# Altium PCB Reader32chv2.PcbDoc
Units mm, origin at the board's own origin, x right, y up, seen from the top; angles counter-clockwise.
Board outline 30.43 x 36.22 mm, 4 copper layers (Top Layer, Signal Layer 1, Signal Layer 2, Bottom Layer), stack 0.778 mm thick; 35 components, 73 nets, 286 pads, 85 vias.
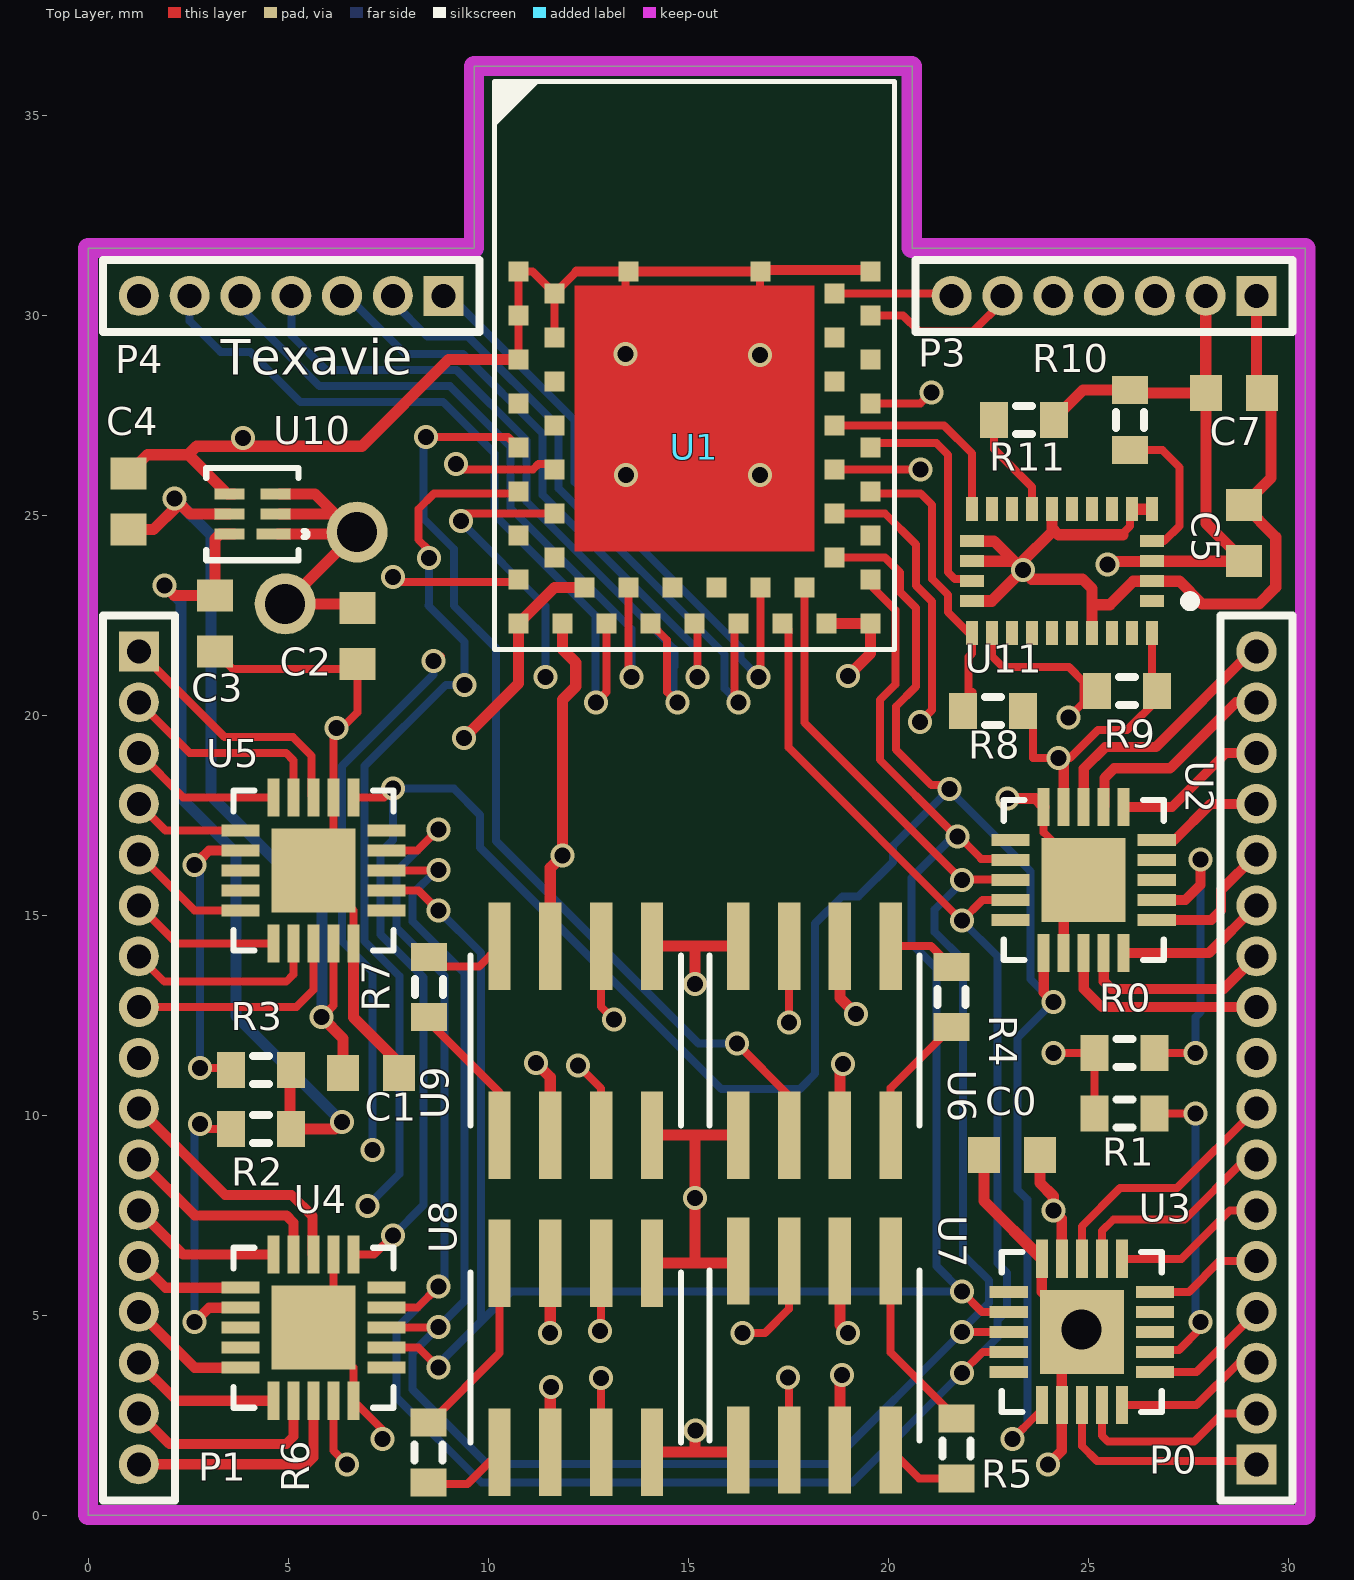
[diagram p0: Top Layer view]
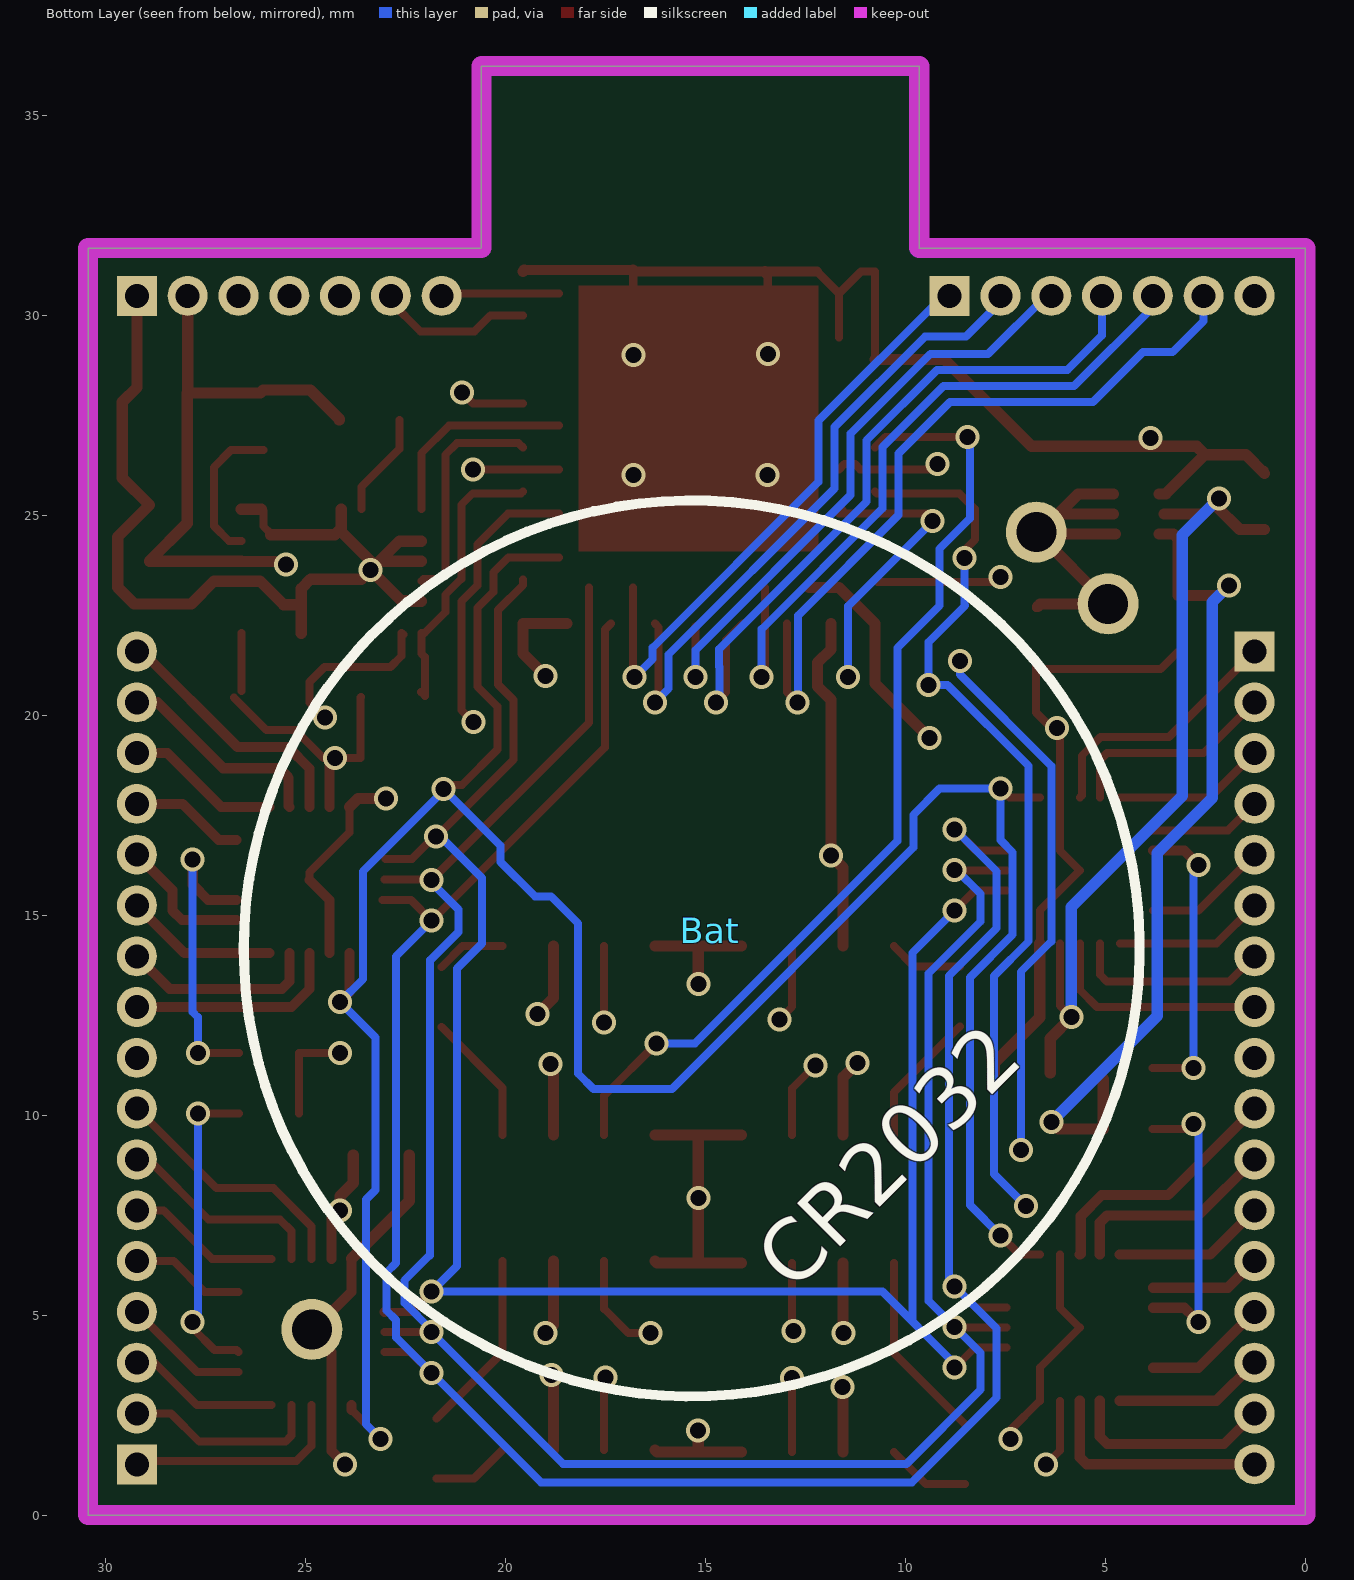
[diagram p1: Bottom Layer view, seen from below]
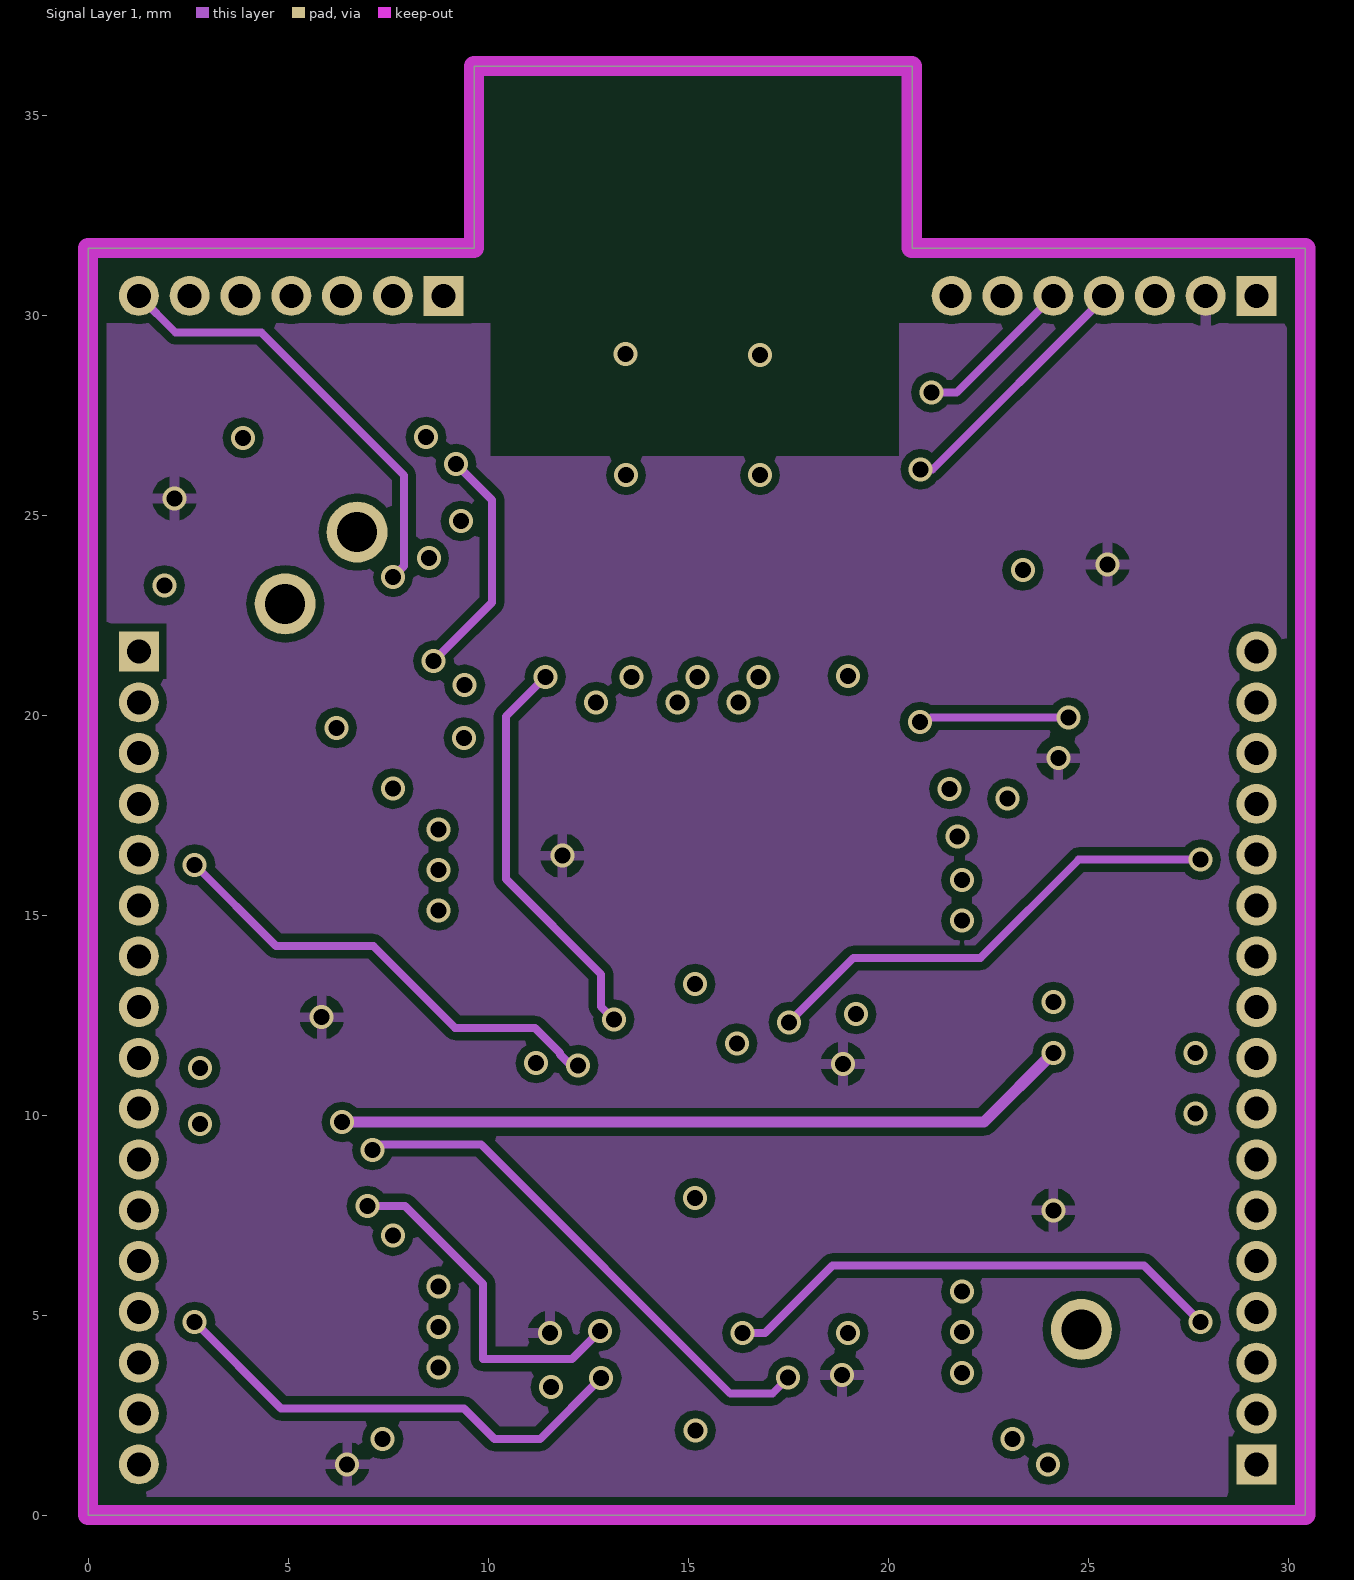
[diagram p2: Signal Layer 1]
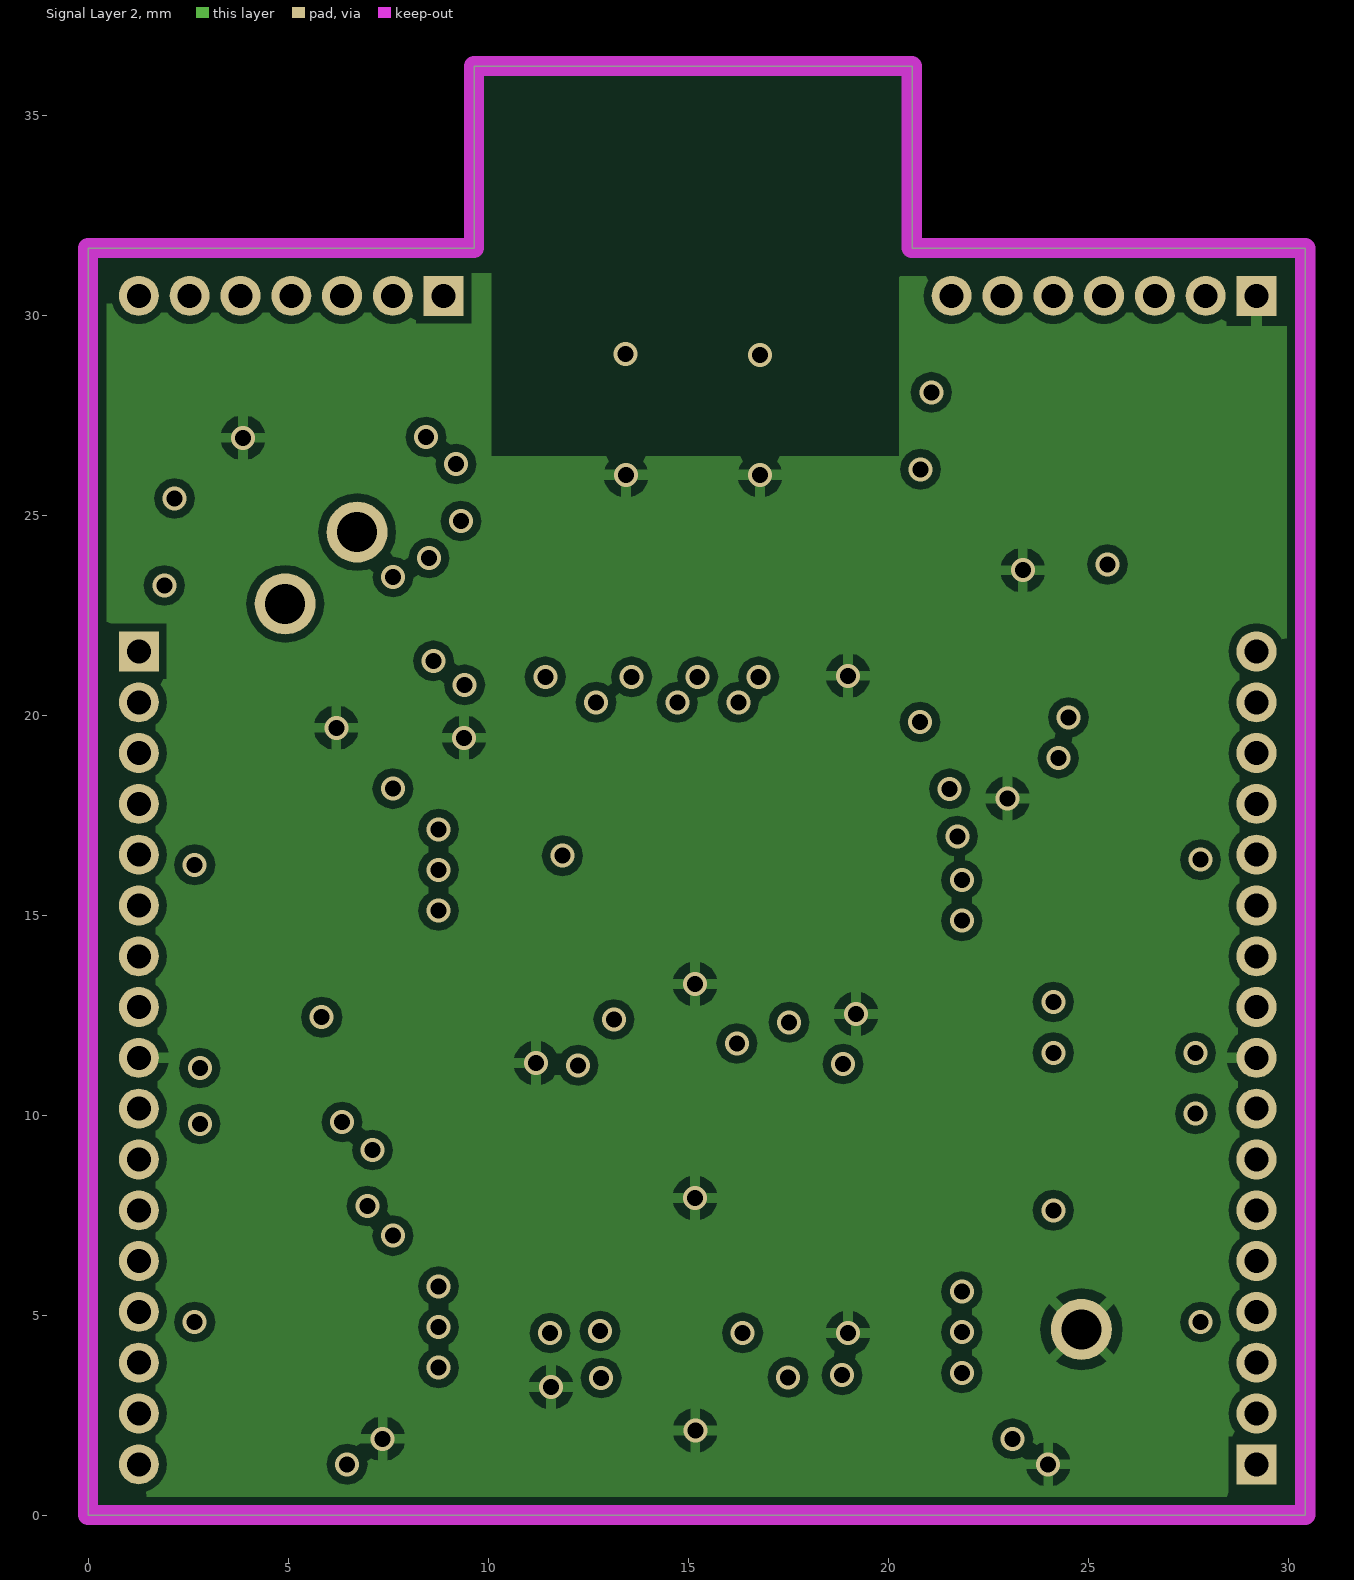
[diagram p3: Signal Layer 2]

## Layer stack, top to bottom
Top Solder: solder mask 0.0102, Solder Resist, Dk 3.5
Top Layer: signal copper 0.0356
Dielectric 1: core 0.254, FR-4, Dk 4.2
Signal Layer 1: signal copper 0.036
Dielectric 3: prepreg 0.127, Dk 4.2
Signal Layer 2: signal copper 0.036
Dielectric 2: core 0.254, Dk 4.2
Bottom Layer: signal copper 0.0356
Bottom Solder: solder mask 0.0102, Solder Resist, Dk 3.5

## Board outline
0,0 0,31.675 9.652,31.675 9.652,36.22 20.599,36.22 20.599,31.675 30.43,31.675 30.43,0

## Design rules (kind name [scope] priority, off if disabled: settings)
Clearance [All] p1: gap=0.2
ComponentClearance [All] p1: gap=0.2 collisioncheckmode=3 verticalgap=0.2 showdistances=TRUE
HoleSize [All] p1: absolutevalues=TRUE maxlimit=2.54 minlimit=0.02 maxpercent=80.000 minpercent=20.000
HoleToHoleClearance [All] p1: gap=0.2 allowstackedmicrovias=TRUE
MinimumSolderMaskSliver MinimumSolderMaskSliver_1 [All] p1: minsoldermaskwidth=0.1
MinimumSolderMaskSliver [All] p2: minsoldermaskwidth=0.1
PolygonConnect [All] p1: connectstyle=Relief reliefconductorwidth=0.254 reliefentries=4 polygonreliefangle="90 Angle" airgapwidth=0.254
RoomDefinition Reader32chv2 [InComponentClass('Reader32chv2')] p1: confinementstyle=ConfineIn formatcopy=TRUE lockcomponents=FALSE outline 0.07,0.07 0.07,31.68 9.735,31.68 9.735,36.265 20.585,36.265 20.585,31.68 30.41,31.68 30.41,22.79 30.41,0.07 21.193,0.07 21.193,0.003 15.224,0.003 15.224,-0.048 9.16,-0.048 9.16,0.07
RoutingVias [All] p1: holewidth=0.4 width=0.6 viastyle="Through Hole" minholewidth=0.4 minwidth=0.6 maxholewidth=0.4 maxwidth=0.6
SilkToSilkClearance [All] p1: silktosilkclearance=0.2
SilkToSolderMaskClearance [IsPad] p1: minsilkscreentomaskgap=0.1 clearancetoexposedcopper=FALSE
SolderMaskExpansion [All] p1: expansion=0
Width [All] p1: maxlimit=0.6 minlimit=0.2 preferedwidth=0.2
24 further rules are at their usual default settings.

## Components (designator, comment, footprint, x,y, rotation, side; value= is the part's Value field where it differs from the comment)
Bat "" BU-2032 24.848,4.656 r315 bottom (schematic designator BAT)
C0 "" 1608[0603] 23.1,9 r180 top
C1 "" 1608[0603] 7.075,11.05 r0 top
C2 "" 1608[0603] 6.731,21.971 r90 top
C3 "" 1608[0603] 3.175,22.29 r90 top
C4 "" 1608[0603] 1.016,25.338 r270 top
C5 "" 1608[0603] 28.895,24.55 r270 top
C7 "" 1608[0603] 28.65,28.05 r180 top
P0 "MHDR1X17" MHDR1X17 29.21,1.27 r90 top
P1 "MHDR1X17" MHDR1X17 1.27,21.59 r270 top
P3 "MHDR1X7" MHDR1X7 29.21,30.48 r180 top
P4 "MHDR1X7" MHDR1X7 8.89,30.48 r180 top
R0 "" J1-0603 25.908,11.557 r0 top
R1 "" J1-0603 25.908,10.033 r0 top
R2 "" J1-0603 4.325,9.65 r180 top
R3 "" J1-0603 4.325,11.125 r180 top
R4 "" J1-0603 21.59,12.954 r270 top
R5 "" J1-0603 21.717,1.663 r270 top
R6 "" J1-0603 8.51,1.56 r90 top
R7 "" J1-0603 8.525,13.2 r90 top
R8 "" J1-0603 22.625,20.1 r180 top
R9 "" J1-0603 25.975,20.6 r180 top
R10 "" J1-0603 26.05,27.375 r90 top
R11 "" J1-0603 23.4,27.375 r0 top
U1 "BMD-300" BMD-300 17.91,23.19 r270 top
U2 "ADG758BCPZ" CP_20_6 24.892,15.875 r90 top
U3 "ADG758BCPZ" CP_20_6 24.843,4.58 r90 top
U4 "ADG758BCPZ" CP_20_6 5.637,4.683 r270 top
U5 "ADG758BCPZ" CP_20_6 5.637,16.113 r270 top
U6 "AD627ARZ-R7" R_8 18.161,11.862 r270 top
U7 "AD627ARZ-R7" R_8 18.161,3.988 r270 top
U8 "AD627ARZ-R7" R_8 12.192,3.937 r90 top
U9 "AD627ARZ-R7" R_8 12.192,11.862 r90 top
U10 "TLV7111233DSER" DSE6 4.11,25.025 r180 top
U11 "BNO055" PQFN50P520X380X118-28N 24.348,23.596 r180 top

## Footprints (in the part's own frame and the unit in brackets; to place one, negate y for a bottom-side part, rotate by r counter-clockwise, add the part's x,y. Pads: shape width x height; smd on the part's side, far side on the other; paste and mask are expansions set on the pad)
1608[0603] [mm] "Chip Capacitor, Body 1.6x0.8mm, IPC High Density"
  rect 0.8x0.9 smd: 1(-0.7,0) 2(0.7,0)
  body extent -0.87,-0.48 0.87,0.48, height 1.3
BMD-300 [mm] "BMD-300, LGA, 47pin ,1.1mm Pitch, 14mm x 9.8mm"
  rect 0.49x0.49 smd: 1(-7.9,-7.15) 2(-7.35,-6.25) 3(-6.8,-7.15) 4(-6.25,-6.25) 5(-5.7,-7.15) 6(-5.15,-6.25) 7(-4.6,-7.15) 8(-4.05,-6.25) 9(-3.5,-7.15) 10(-2.95,-6.25) 11(-2.4,-7.15) 12(-1.85,-6.25) 13(-1.3,-7.15) 14(-0.75,-6.25) 15(-0.2,-7.15) 16(0.9,-7.15) 17(0.9,-6.05) 18(0,-5.5) 19(0.9,-4.95) 20(0,-4.4) 21(0.9,-3.85) 22(0,-3.3) 23(0.9,-2.75) 24(0,-2.2) 25(0.9,-1.65) 26(0,-1.1) 27(0.9,-0.55) 28(0,0) 29(0.9,0.55) 30(0.9,1.65) 31(-0.2,1.65) 32(-0.75,0.75) 33(-1.3,1.65) 34(-1.85,0.75) 35(-2.4,1.65) 36(-2.95,0.75) 37(-3.5,1.65) 38(-4.05,0.75) 39(-4.6,1.65) 40(-5.15,0.75) 41(-5.7,1.65) 42(-6.25,0.75) 43(-6.8,1.65) 44(-7.35,0.75) 45(-7.9,1.65) 46(-7.9,-1.1) 47(-7.9,-4.4)
  Multi-Layer pour cut-out: -8.15,-7.65 -8.15,2.15 -12.55,2.15 -12.55,-7.65
  silkscreen extent -12.65,-7.75 1.55,2.25, body extent -12.55,-7.65 1.45,2.15, height 1.89
BU-2032 [mm]
  round 1.524 hole 1: 1(0,0.02) 2(-26.9,-1.27) 3(-26.9,1.27)
  silkscreen extent -24.65,-11.2 -2.25,11.2
CP_20_6 [mm]
  rect 0.955x0.3 smd: 1(-1.827,1) 2(-1.827,0.5) 3(-1.827,0) 4(-1.827,-0.5) 5(-1.827,-1) 11(1.827,-1) 12(1.827,-0.5) 13(1.827,0) 14(1.827,0.5) 15(1.827,1)
  rect 0.3x0.955 smd: 6(-1,-1.827) 7(-0.5,-1.827) 8(0,-1.827) 9(0.5,-1.827) 10(1,-1.827) 16(1,1.827) 17(0.5,1.827) 18(0,1.827) 19(-0.5,1.827) 20(-1,1.827)
  rect 2.1x2.1 smd paste-1.037: 21(0,0)
  silkscreen extent -2,-2 2,2, body extent -2.01,-2.01 2.01,2.01, height 0.78
DSE6 [mm]
  rect 0.85x0.28 smd paste-0.14 mask+0: 1(-0.525,0.5)
  rect 0.75x0.28 smd paste-0.14 mask+0: 2(-0.575,0) 3(-0.575,-0.5) 6(0.575,0.5)
  rect 0.75x0.27 smd paste-0.14 mask+0: 4(0.575,-0.5) 5(0.575,0)
  silkscreen extent -1.38,-1.16 1.16,1.16, body extent -0.77,-0.75 0.77,0.75, height 0.75
J1-0603 [mm] "Chip Resistor, Body 1.6x0.8mm, IPC High Density"
  rect 0.7x0.9 smd: 1(-0.75,0) 2(0.75,0)
  silkscreen extent -0.2,-0.35 0.2,0.35, body extent -0.85,-0.48 0.85,0.48, height 0.9
MHDR1X7 [mm] "Connector; Header; 7 Position"
  rect 1x1 hole 0.6: 1(0,0)
  round 1 hole 0.6: 2(1.27,0) 3(2.54,0) 4(3.81,0) 5(5.08,0) 6(6.35,0) 7(7.62,0)
  silkscreen extent -0.9,-0.9 8.52,0.9
MHDR1X17 [mm] "Connector; Header; 17 Position"
  rect 1x1 hole 0.6: 1(0,0)
  round 1 hole 0.6: 2(1.27,0) 3(2.54,0) 4(3.81,0) 5(5.08,0) 6(6.35,0) 7(7.62,0) 8(8.89,0) 9(10.16,0) 10(11.43,0) 11(12.7,0) 12(13.97,0) 13(15.24,0) 14(16.51,0) 15(17.78,0) 16(19.05,0) 17(20.32,0)
  silkscreen extent -0.9,-0.9 21.22,0.9
PQFN50P520X380X118-28N [mm]
  rect 0.6x0.3 smd: 1(-2.25,0.75) 2(-2.25,0.25) 3(-2.25,-0.25) 4(-2.25,-0.75) 15(2.25,-0.75) 16(2.25,-0.25) 17(2.25,0.25) 18(2.25,0.75)
  rect 0.3x0.6 smd: 5(-2.25,-1.55) 6(-1.75,-1.55) 7(-1.25,-1.55) 8(-0.75,-1.55) 9(-0.25,-1.55) 10(0.25,-1.55) 11(0.75,-1.55) 12(1.25,-1.55) 13(1.75,-1.55) 14(2.25,-1.55) 19(2.25,1.55) 20(1.75,1.55) 21(1.25,1.55) 22(0.75,1.55) 23(0.25,1.55) 24(-0.25,1.55) 25(-0.75,1.55) 26(-1.25,1.55) 27(-1.75,1.55) 28(-2.25,1.55)
  silkscreen extent -3.33,0.63 -3.08,0.87
R_8 [mil]
  rect 86x22 smd paste+0 mask+0: 1(-93,75) 2(-93,25) 3(-93,-25) 4(-93,-75) 5(93,-75) 6(93,-25) 7(93,25) 8(93,75)
  silkscreen extent -84,-104 84,104, body extent -122,-98 122,98, height 69

## Part data
Bat: library part BT
C0 C1 C2 C3 C4 C5 C7: library part "Cap Semi", "Capacitor (Semiconductor SIM Model)"
P0 P1: "Header, 17-Pin"
P3 P4: "Header, 7-Pin"
R0 R1 R2 R3 R4 R5 R6 R7 R8 R9 R10 R11: library part Res3, "Resistor"
U1: library part BMD-300-A, "Bluetooth 4.2 LE Module, nRF52832, 512kB Flash, 64kB RAM"
U2 U3 U4 U5 U6 U7 U8 U9 U10: "Imported"
U11: "IMUs - Inertial Measurement Units Absolute Orientation 9-Axis Sensor"

## Via types
v1: diameter 0.6, hole 0.4, Top Layer to Bottom Layer, 84 vias
v2: diameter 0.6, hole 0.4, Top Layer to Bottom Layer, tented top, 1 vias

## Nets (pads, with @x,y where several pads share a name; then routed paths per layer and width w, separated by ;. In a path a pad name is that pad's centre, name@x,y a point inside that pad or via, vN(x,y) a via of type N, cw(c..) or ccw(c..) an arc to the next point about the centre after c; other vN are vias at no path point)
A0: P0.10 U2.3 | length 5.4
  Top Layer w0.254: U2.3 24.892,13.153 25.345,12.7 P0.10
A1: P0.11 U2.4 | length 4.9
  Top Layer w0.254: U2.4 25.392,13.343 25.581,13.154 28.394,13.154 P0.11
A2: P0.12 U2.5 | length 3.8
  Top Layer w0.254: U2.5 28.018,14.048 P0.12
A3: P0.13 U2.6 | length 3.5
  Top Layer w0.254: U2.6 28.083,14.875 28.321,15.113 28.321,15.621 P0.13
A4: P0.14 U2.10 | length 2.9
  Top Layer w0.254: U2.10 27.162,16.875 28.067,17.78 P0.14
A5: P0.15 U2.11 | length 3.9
  Top Layer w0.254: U2.11 27.1,17.702 28.448,19.05 P0.15
A6: P0.16 U2.12 | length 5.3
  Top Layer w0.254: U2.12 25.415,17.725 25.415,18.43 25.654,18.669 27.051,18.669 28.702,20.32 P0.16
A7: P0.17 U2.13 | length 6.5
  Top Layer w0.254: U2.13 24.892,18.663 25.427,19.198 26.691,19.198 29.083,21.59 P0.17
ADC-C0: U1.9 U6.6 | length 24.2
  Top Layer w0.2: v1(8.45,26.95) 10.5,26.95 U1.9 ; v1(16.22,11.79) 17.526,10.484 U6.6
  Bottom Layer w0.2: v1(8.45,26.95) 8.382,26.882 8.382,24.918 9.144,24.156 9.144,22.733 10.2,21.677 10.2,16.851 15.261,11.79 v1(16.22,11.79)
ADC-C1: U1.10 U7.6 | length 37.2
  Top Layer w0.2: v1(8.635,21.355) 8.71,21.355 v1@8.821,21.466 ; v1(9.2,26.275) 9.33,26.145 11.129,26.145 11.259,26.275 11.525,26.275 U1.10 ; U7.6 v1@17.526,3.445
  Signal Layer 1 w0.2: v1@7.145,9.27 9.82,9.27 16.055,3.035 17.106,3.035 v1@17.5,3.429 ; v1(8.635,21.355) 10.095,22.815 10.095,25.38 v1(9.2,26.275)
  Bottom Layer w0.2: v1@7.112,9.05 7.112,13.582 6.35,14.344 6.35,18.727 8.635,21.012 v1(8.635,21.355)
  other v1: 17.5,3.445 7.11,9.125
ADC-C2: U1.11 U8.6 | length 33.1
  Top Layer w0.2: v1(8.525,23.925) 8.525,24.114 8.255,24.384 8.255,25.146 8.649,25.54 9.514,25.54 10.71,25.54 U1.11 ; v1(12.8,4.6) 12.827,4.627 U8.6
  Signal Layer 1 w0.2: v1(6.98,7.725) 7.925,7.725 9.875,5.775 9.875,3.9 12.1,3.9 v1(12.8,4.6)
  Bottom Layer w0.2: v1(6.98,7.725) 7.78,8.525 7.78,13.48 6.913,14.347 6.913,18.724 8.944,20.755 v1(9.415,20.755) 9.415,21.827 8.509,22.733 8.525,22.749 v1(8.525,23.925)
ADC-C3: U1.12 U9.6 | length 19.4
  Top Layer w0.2: v1(9.321,24.851) 9.321,24.896 9.46,25.035 U1.12@11.655,25.035 ; U1.12@11.574,25.126 U1.12 ; U9.6 12.827,12.708 v1(13.145,12.39)
  Signal Layer 1 w0.2: v1(11.43,20.955) 10.445,19.97 10.445,15.9 12.827,13.518 12.827,12.708 v1(13.145,12.39)
  Bottom Layer w0.2: v1(9.321,24.851) 9.321,24.831 11.43,22.722 v1(11.43,20.955)
B0: P0.1 U3.3 | length 5.6
  Top Layer w0.2: U3.3 24.843,1.732 25.223,1.351 29.129,1.351 P0.1
B1: P0.2 U3.4 | length 5
  Top Layer w0.2: U3.4 25.343,1.987 25.495,1.835 27.65,1.835 28.355,2.54 P0.2
B2: P0.3 U3.5 | length 3.8
  Top Layer w0.2: U3.5 27.713,2.753 28.77,3.81 P0.3
B3: P0.4 U3.6 | length 3.2
  Top Layer w0.2: U3.6 27.71,3.58 P0.4
B4: P0.5 U3.10 | length 2.9
  Top Layer w0.2: U3.10 27.52,5.58 28.29,6.35 P0.5
B5: P0.6 U3.11 | length 3.9
  Top Layer w0.2: U3.11 27.332,6.407 28.545,7.62 P0.6
B6: P0.7 U3.12 | length 5.3
  Top Layer w0.2: U3.12 25.343,7.098 25.63,7.385 27.415,7.385 28.92,8.89 P0.7
B7: P0.8 U3.13 | length 6.4
  Top Layer w0.2: U3.13 24.843,7.218 25.8,8.175 27.225,8.175 P0.8
C0: P1.10 U4.3 | length 6.4
  Top Layer w0.254: P1.10 3.429,8.001 5.087,8.001 5.614,7.474 5.614,6.533 U4.3
C1: P1.11 U4.4 | length 5.3
  Top Layer w0.254: P1.11 2.667,7.493 4.953,7.493 5.137,7.309 U4.4
C2: P1.12 U4.5 | length 3.8
  Top Layer w0.254: P1.12 2.38,6.51 U4.5
C3: P1.13 U4.6 | length 2.8
  Top Layer w0.254: P1.13 1.937,5.683 U4.6
C4: P1.14 U4.10 | length 3.1
  Top Layer w0.254: P1.14 2.667,3.683 U4.10
C5: P1.15 U4.11 | length 3.8
  Top Layer w0.254: P1.15 2.224,2.856 U4.11
C6: P1.16 U4.12 | length 5.2
  Top Layer w0.254: P1.16 2.032,1.778 4.953,1.778 5.137,1.962 U4.12
C7: P1.17 U4.13 | length 5.8
  Top Layer w0.254: P1.17 5.461,1.27 5.637,1.446 U4.13
D0: P1.1 U5.3 | length 6.5
  Top Layer w0.2: P1.1 3.41,19.45 5.119,19.45 5.587,18.981 5.587,17.99 U5.3
  Top Layer w0.254: P1.1 P1.1@1.35,21.59
D1: P1.2 U5.4 | length 5.4
  Top Layer w0.2: P1.2 2.54,19.05 4.953,19.05 5.137,18.866 U5.4
D2: P1.3 U5.5 | length 3.8
  Top Layer w0.2: P1.3 2.38,17.94 U5.5
D3: P1.4 U5.6 | length 2.8
  Top Layer w0.2: P1.4 1.937,17.113 U5.6
D4: P1.5 U5.10 | length 3.1
  Top Layer w0.2: P1.5 2.667,15.113 U5.10
D5: P1.6 U5.11 | length 3.8
  Top Layer w0.2: P1.6 2.224,14.286 U5.11
D6: P1.7 U5.12 | length 5
  Top Layer w0.2: P1.7 1.905,13.335 4.953,13.335 5.137,13.519 U5.12
D7: P1.8 U5.13 | length 5.7
  Top Layer w0.2: P1.8 5.207,12.7 5.637,13.13 U5.13
GND: Bat.1 C0.2 C1.2 C2.1 C3.1 C4.1 C5.1 C7.1 P0.9 P1.9 P3.1 U1.1 U1.2 U1.3 U1.4 U1.5 U1.16 U1.18 U1.29 U1.30 U1.45 U1.46 U1.47 U2.2 U2.15 U2.21 U3.2 U3.15 U3.21 U4.2 U4.15 U4.21 U5.2 U5.15 U5.21 U6.2 U6.4 U6.5 U7.2 U7.4 U7.5 U8.2 U8.4 U8.5 U9.2 U9.4 U9.5 U10.4 U11.2 U11.5 U11.6 U11.10 U11.15 U11.16 U11.18 U11.25 | length 119
  Top Layer w0.2: C4.1 C4.1@1.016,26.127 ; C3.1 3.615,21.15 6.61,21.15 C2.1 6.731,20.066 6.137,19.472 6.137,16.613 U5.21 6.637,15.113 U5.15 ; U4.2 6.137,5.183 U4.21 6.637,3.683 U4.15 7.366,2.127 v1(7.366,1.905) ; U11.18 22.148,22.896 22.522,22.896 ; U2.15 23.892,17.068 24.892,16.068 U2.21 ; 25.872,24.546 26.048,24.722 26.048,25.096 U11.6 ; U11.2@26.548,23.296 U11.2
  Top Layer w0.203: U1.5 U1.3 U1.1 11.11,31.09 U1.2 ; U1.4 U1.2 ; 12.21,31.09 U1.2 ; v1(13.437,29.032) U1.47@13.437,31.017 ; v1(16.8,29) U1.46@16.8,31.08
  Top Layer w0.254: 12.21,31.09 U1.47 U1.46 ; U1.46@16.81,31.125 U1.45@19.525,31.125 ; U3.15 23.843,5.58 U3.21 24.343,4.08 24.343,1.61 v1(24.003,1.27) ; U2.2 24.392,15.375 U2.21
  Top Layer w0.28: C4.1 1.488,26.51 2.505,26.51 ; U10.4@3.65,25.525 3.49,25.525 2.505,26.51 ; U5.15 6.637,12.438 7.775,11.3 C1.2 ; v1(9.398,19.431) 10.76,20.793 U1.16 11.66,23.19 U1.18 ; U1.5 9.015,28.89 6.845,26.72 2.715,26.72 2.505,26.51 ; v1(11.2,11.3) 11.557,10.943 U9.2 ; U8.2 11.557,3.182 v1(11.575,3.2) ; U1.47@13.45,31.03 U1.47 ; U8.4 15.15,1.575 ; U8.5 15.15,6.299 ; U9.4 15.125,9.5 ; U9.5 15.225,14.224 ; v1@15.175,2.115 15.175,1.6 15.15,1.575 ; v1(15.175,13.275) 15.175,14.174 15.225,14.224 ; U7.5 16.205,1.575 15.15,1.575 ; U7.4 16.205,6.299 15.15,6.299 ; U6.5 15.125,9.5 ; U6.4 15.225,14.224 ; U1.46 U1.46@16.81,31.125 ; U1.29 U1.30 19.56,21.541 v1(18.999,20.98) ; U7.2 18.796,4.754 v2(19,4.55) ; U6.2 18.796,12.929 v1(19.2,12.525) ; U1.45@19.525,31.125 U1.45 ; U11.18 22.592,22.846 v1(23.368,23.622) ; U11.16 23.144,23.846 22.644,24.346 U11.15 ; C0.2 22.4,7.85 U3.15 ; v1(22.987,17.913) 23.681,17.913 U2.15 ; U11.10 24.098,24.672 ; U11.25 25.098,22.76 ; 25.872,24.506 24.264,24.506 24.098,24.672 ; U11.6 U11.5 ; P3.1 29.21,28.19 29.575,27.825 29.575,25.93 C5.1 29.69,24.455 29.69,23.195 29.275,22.78 27.85,22.78 27.284,23.346 U11.2 26.131,23.346 25.545,22.76 25.098,22.76 ; 15.125,9.5 15.175,9.45 v1(15.175,7.925) 15.175,6.324 15.15,6.299 ; v1(23.368,23.622) 23.368,23.848 24.098,24.578 24.098,24.672 ; v1(23.368,23.622) 23.594,23.396 24.864,23.396 25.098,23.162 25.098,22.76
  other v1: 15.18,2.115 6.205,19.68 13.45,26 16.8,26 3.875,26.93
I2CADD: U1.37 U11.17 | length 5.8
  Top Layer w0.2: U1.37 19.666,26.796 21.209,26.796 21.498,26.507 21.498,23.572 21.674,23.396 U11.17@22.048,23.396 ; U11.17@22.048,23.396 U11.17 U11.17@22.048,23.396
INT: U1.38 U11.14 | length 5.1
  Top Layer w0.2: U1.38 21.401,27.24 22.098,26.543 U11.14
MUX-A: U1.27 U2.19 U3.19 U4.19 U5.19 | length 59.2
  Top Layer w0.2: U4.19 8.231,5.183 v1(8.763,5.715) ; U5.19 8.231,16.613 v1(8.763,17.145) ; U1.27 17.51,22.14 17.51,19.193 v1(21.844,14.859) 22.36,15.375 U2.19 ; v1(21.844,3.556) 22.368,4.08 U3.19
  Bottom Layer w0.2: v1(8.763,17.145) 7.713,16.095 7.713,14.678 8.91,13.481 8.91,5.862 v1(8.763,5.715) 7.713,4.665 7.713,2.937 9.83,0.82 19.108,0.82 v1(21.844,3.556) 22.733,4.445 22.733,4.878 22.975,5.12 22.975,6.056 22.733,6.298 22.733,13.97 v1(21.844,14.859)
MUX-B: U1.28 U2.18 U3.18 U4.18 U5.18 | length 56.6
  Top Layer w0.2: U4.18 8.747,4.683 v1(8.763,4.699) ; U5.18 8.747,16.113 v1(8.763,16.129) ; U1.28 17.91,19.809 v1(21.844,15.875) ; v1@21.852,4.58 U3.18 ; v1@21.852,15.883 U2.18@23.015,15.883
  Top Layer w0.254: v1(21.844,4.572) v1@21.852,4.58 ; v1(21.844,15.875) v1@21.852,15.883
  Bottom Layer w0.2: v1(8.763,16.129) 8.718,16.129 8.113,15.524 8.113,14.844 9.413,13.544 9.413,5.349 v1(8.763,4.699) 8.113,4.049 8.113,3.137 9.97,1.28 18.552,1.28 v1(21.844,4.572) ; v1@21.823,4.609 22.521,5.308 22.521,5.868 21.904,6.485 21.879,6.485 21.879,13.875 21.871,13.875 21.167,14.579 21.167,15.139 v1@21.844,15.816
  Bottom Layer w0.254: v1(21.844,4.572) v1@21.879,4.607 ; v1@21.844,15.816 v1(21.844,15.875)
MUX-C: U1.31 U2.17 U3.17 U4.17 U5.17 | length 50.5
  Top Layer w0.2: U4.17 8.263,4.183 v1(8.763,3.683) ; U5.17 8.263,15.613 v1(8.763,15.113) ; U1.31 19.56,23.247 20.182,22.625 20.182,20.763 19.793,20.374 19.793,18.884 21.552,17.125 v1@21.61,17.125 ; v1@21.6,17.125 v1@21.61,17.125 ; v1(21.844,5.588) 22.352,5.08 U3.17 ; U2.17@22.992,16.406 22.329,16.406 v1@21.61,17.125
  Top Layer w0.254: U3.17@22.992,5.103 U3.17
  Bottom Layer w0.2: v1(8.763,3.683) 8.763,3.78 10.571,5.588 v1(21.844,5.588) 21.209,6.223 21.209,13.666 20.585,14.29 20.585,15.93 v1@21.582,16.927 ; v1(8.763,15.113) 9.82,14.056 9.82,4.837
  other v1: 21.73,16.97
MUX-EN: U1.32 U2.1 U3.1 U4.1 U5.1 | length 66.4
  Top Layer w0.2: U4.1 7.145,6.51 v1(7.62,6.985) ; U5.1 7.399,17.94 v1(7.62,18.161) ; U1.32 19.924,23.94 20.298,23.566 20.298,23.075 20.698,22.675 20.698,20.713 20.193,20.208 20.193,19.139 21.085,18.247 v1@21.504,18.247 ; v1@22.987,1.778 U3.1@23.843,2.634
  Top Layer w0.254: U3.1@23.843,2.634 U3.1 ; U2.1 23.892,13.065 v1(24.13,12.827)
  Bottom Layer w0.2: v1(7.62,6.985) 8.385,7.75 8.385,13.44 7.313,14.512 7.313,16.568 7.62,16.875 v1(7.62,18.161) 9.144,18.161 9.8,17.505 9.8,16.685 15.832,10.653 17.795,10.653 18.176,11.034 18.176,14.791 18.855,15.47 19.26,15.47 20.12,16.33 20.12,16.735 v1(21.54,18.155) 21.54,18.114 23.56,16.094 23.56,13.397 v1(24.13,12.827) 23.241,11.938 23.241,8.128 23.48,7.889 23.48,2.271 v1@22.987,1.778
  other v1: 23.114,1.905
NetP4_1: P4.1 U1.26 | length 15.1
  Top Layer w0.2: v1(16.764,20.955) 16.805,20.996 U1.26@16.805,23.185
  Bottom Layer w0.2: P4.1 9.051,30.48 12.167,27.365 12.167,25.832 16.315,21.683 16.315,21.404 v1(16.764,20.955)
NetP4_2: P4.2 U1.25 | length 16.4
  Top Layer w0.2: v1(16.256,20.32) 16.164,20.412 16.164,22.194 U1.25
  Bottom Layer w0.2: P4.2 7.62,30.326 8.482,29.464 9.502,29.464 11.767,27.199 11.767,25.666 15.915,21.518 15.915,20.661 v1(16.256,20.32)
NetP4_3: P4.3 U1.23 | length 15.4
  Top Layer w0.2: v1(15.24,20.955) U1.23@15.24,22.21
  Bottom Layer w0.2: P4.3 6.475,30.48 7.93,29.025 9.375,29.025 11.367,27.033 11.367,25.5 15.24,21.627 v1(15.24,20.955)
NetP4_4: P4.4 U1.21 | length 18.3
  Top Layer w0.2: U1.21 14.478,21.872 14.478,20.574 v1(14.732,20.32)
  Bottom Layer w0.2: P4.4 5.08,29.493 5.948,28.625 9.209,28.625 10.967,26.868 10.967,25.335 14.655,21.646 14.655,21.219 14.64,21.204 14.64,20.412 v1(14.732,20.32)
NetP4_5: P4.5 U1.20 | length 17.8
  Top Layer w0.2: U1.20 13.51,21.034 v1(13.589,20.955)
  Bottom Layer w0.2: P4.5 3.81,30.197 5.782,28.225 9.044,28.225 10.567,26.702 10.567,25.169 13.59,22.146 v1(13.589,20.955)
NetP4_6: P4.6 U1.19 | length 19
  Top Layer w0.2: v1(12.7,20.32) 12.96,20.58 U1.19
  Bottom Layer w0.2: P4.6 2.54,29.85 3.315,29.075 4.055,29.075 5.305,27.825 8.878,27.825 10.167,26.536 10.167,25.003 12.685,22.485 v1@12.685,20.32
NetP4_7: P4.7 U1.15 | length 14.3
  Top Layer w0.2: v1(7.625,23.45) 7.75,23.325 10.695,23.325 U1.15@10.738,23.368
  Signal Layer 1 w0.2: P4.7 2.19,29.56 4.335,29.56 7.9,25.995 7.9,23.725 v1(7.625,23.45)
NetR4_1: R4.1 U6.1 | length 1.7
  Top Layer w0.2: U6.1 21.07,14.224 R4.1
NetR4_2: R4.2 U6.8 | length 3.3
  Top Layer w0.2: U6.8 20.066,10.68 R4.2
NetR5_1: R5.1 U7.1 | length 4.6
  Top Layer w0.2: U7.1 20.066,4.064 R5.1
NetR5_2: R5.2 U7.8 | length 1.9
  Top Layer w0.2: U7.8 20.779,0.913 R5.2
NetR6_1: R6.1 U8.1 | length 2.1
  Top Layer w0.2: R6.1@8.51,0.774 9.486,0.774 U8.1
NetR6_2: R6.2 U8.8 | length 4.7
  Top Layer w0.2: R6.2@8.527,2.293 10.287,4.052 U8.8
NetR7_1: R7.1 U9.1 | length 3.4
  Top Layer w0.2: R7.1@8.636,12.216 10.287,10.565 U9.1
NetR7_2: R7.2 U9.8 | length 1.9
  Top Layer w0.2: R7.2@8.636,13.716 9.779,13.716 U9.8
NetR10_1: R10.1 U11.4 | length 3.7
  Top Layer w0.2: R10.1 26.855,26.625 27.285,26.195 27.285,24.73 26.901,24.346 U11.4
NetR11_1: R11.1 U11.11 | length 2.6
  Top Layer w0.2: R11.1 22.65,26.65 23.598,25.702 U11.11
RESETN: P3.5 U1.39 | length 5.8
  Top Layer w0.2: U1.39 20.805,27.79 v1(21.082,28.067)
  Signal Layer 1 w0.2: v1@21.168,28.067 v1(21.082,28.067) 21.717,28.067 P3.5
S0: R0.2 U2.7 U6.3 | length 21.7
  Top Layer w0.2: v1(17.526,12.319) U6.3 ; R0.2 v1(27.686,11.557)
  Top Layer w0.254: U2.7 27.433,15.375 27.813,15.755 v1(27.813,16.383)
  Signal Layer 1 w0.2: v1(17.526,12.319) 19.132,13.925 22.307,13.925 24.765,16.383 v1(27.813,16.383)
  Bottom Layer w0.2: v1(27.686,11.557) 27.686,12.446 27.813,12.573 v1(27.813,16.383)
S1: R1.2 U3.7 U7.3 | length 23.2
  Top Layer w0.2: v1(16.365,4.555) 16.925,4.555 17.526,5.156 U7.3 ; R1.2 v1(27.686,10.033) ; U3.7 26.72,4.13 27.272,4.13 27.813,4.671 v1(27.813,4.826)
  Signal Layer 1 w0.2: v1(16.365,4.555) 16.925,4.555 18.608,6.238 26.401,6.238 v1(27.813,4.826) v1@27.686,4.826
  Bottom Layer w0.2: v1@27.686,4.826 v1(27.686,10.033)
S2: R2.2 U4.7 U8.3 | length 21.2
  Top Layer w0.2: v1(2.794,9.779) 2.921,9.652 R2.2@3.822,9.652 ; U8.3 v1(12.827,3.429)
  Top Layer w0.254: v1@2.794,4.953 3.024,5.183 U4.7
  Signal Layer 1 w0.2: v1@2.794,4.953 v1(2.667,4.826) 4.826,2.667 9.398,2.667 10.16,1.905 11.303,1.905 v1(12.827,3.429)
  Bottom Layer w0.2: v1(2.667,4.826) 2.667,9.652 v1(2.794,9.779)
S3: R3.2 U5.7 U9.3 | length 21.4
  Top Layer w0.2: v1(2.794,11.176) R3.2@3.822,11.176 ; v1(12.25,11.245) 12.827,10.668 U9.3
  Top Layer w0.254: v1@2.794,16.383 3.024,16.613 U5.7
  Signal Layer 1 w0.2: v1@2.667,11.303 v1(2.794,11.176) ; v1(2.667,16.256) 4.699,14.224 7.131,14.224 9.178,12.177 11.172,12.177 11.8,11.549 11.8,11.515 12.25,11.065 v1(12.25,11.245)
  Bottom Layer w0.2: v1(2.667,16.256) 2.794,16.129 v1(2.794,11.176)
SCL: R9.2 U1.34 U11.20 | length 14.8
  Top Layer w0.2: U1.34 18.665,25.035 19.929,25.035 20.698,24.266 20.698,23.24 21.098,22.84 21.098,20.123 v1(20.8,19.825) ; U11.20@22.548,22.016 22.568,22.016 U11.20 22.598,21.471 22.869,21.2 24.52,21.2 24.892,20.828 24.892,20.32 v1(24.511,19.939)
  Signal Layer 1 w0.2: 21.082,19.939 v1(24.511,19.939)
SDA: R8.2 U1.35 U11.19 | length 7
  Top Layer w0.2: U1.35 19.605,25.545 20.81,25.545 21.098,25.257 21.098,23.406 21.498,23.006 21.498,22.572 22.024,22.046 U11.19 22.098,21.539 22.011,21.452 R8.2@22.011,20.475 ; 22.098,20.562 22.11,20.574
SWCLK: P3.6 U1.43 | length 3.9
  Top Layer w0.2: U1.43 20.375,29.99 20.77,29.595 22.125,29.595 22.86,30.33 P3.6
SWDIO: P3.7 U1.44 | length 3
  Top Layer w0.2: U1.44 18.665,30.535 21.59,30.535 P3.7
SWO: P3.4 U1.36 | length 8.6
  Top Layer w0.2: U1.36 20.806,26.14 v1(20.81,26.145)
  Signal Layer 1 w0.2: v1(20.81,26.145) 21.115,26.145 25.4,30.429 P3.4
VB: C3.2 R0.1 R1.1 R2.1 R3.1 U10.6 | length 42.2
  Top Layer w0.2: v1(24.13,11.557) R0.1 R1.1
  Top Layer w0.28: v1(1.905,23.241) 2.156,22.99 C3.2 3.175,24.405 3.295,24.525 U10.6@3.65,24.525 ; R3.1@5.05,10.904 5.05,9.652 6.177,9.652 v1(6.35,9.825)
  Signal Layer 1 w0.28: v1(6.35,9.825) 22.398,9.825 v1(24.13,11.557)
  Bottom Layer w0.28: v1(1.905,23.241) 2.325,22.821 2.325,17.925 3.7,16.55 3.7,12.475 v1(6.35,9.825)
VBAT: Bat.2 Bat.3 C2.2 U10.1 U10.2 U10.3 | length 9.9
  Top Layer w0.2: C2.2@6.687,22.715 C2.2
  Top Layer w0.28: U10.1@4.75,24.525 Bat.2@6.675,24.525 ; U10.2@4.8,25.025 Bat.2@6.175,25.025 ; U10.3@4.8,25.525 5.675,25.525 Bat.2@6.175,25.025 ; C2.2@6.687,22.715 6.623,22.779 Bat.3 Bat.2@6.675,24.525 ; Bat.2@6.175,25.025 Bat.2@6.675,24.525
VDD: C0.1 C1.1 C4.2 C5.2 C7.2 P3.2 R8.1 R9.1 R10.2 R11.2 U1.17 U2.14 U3.14 U4.14 U5.14 U6.7 U7.7 U8.7 U9.7 U10.5 U11.3 U11.28 | length 62.1
  Top Layer w0.2: v1(5.842,12.446) 6.137,12.741 U5.14 ; U4.14 6.137,1.61 v1(6.477,1.27) ; R8.1@23.61,20.447 23.622,20.435 23.622,18.923 v1(24.257,18.923) 24.548,18.923 25.25,19.625 25.975,19.625 R9.1@26.785,20.435 ; R9.1@26.598,20.6 U11.28
  Top Layer w0.254: v1(24.13,7.62) 24.343,7.407 U3.14 ; U2.14 v1@24.392,18.923
  Top Layer w0.28: C4.2 1.638,24.638 2.231,25.231 2.231,25.345 2.548,25.027 U10.5@3.535,25.027 ; v1(5.842,12.446) 6.375,11.913 C1.1 ; v1(11.55,4.55) 11.557,4.557 U8.7 ; U9.7 11.557,16.182 v1(11.858,16.483) 11.858,20.383 12.192,20.717 12.192,21.31 11.858,21.644 11.858,22.288 U1.17 ; U7.7 18.796,3.446 v1(18.85,3.5) ; U6.7 18.796,11.196 v1(18.875,11.275) ; C0.1 23.8,8.3 24.13,7.97 v1(24.13,7.62) ; R11.2 24.15,27.4 24.875,28.125 R10.2 26.125,28.05 C7.2 ; v1(25.485,23.765) 25.556,23.836 26.588,23.836 U11.3 C5.2@28.891,23.846 ; P3.2 27.94,28.06 C7.2 ; C5.2 27.95,24.795 C7.2
  Bottom Layer w0.28: v1@2.231,25.345 3.075,24.5 3.075,17.975 5.85,15.2 5.85,12.454 v1(5.842,12.446)
  other v1: 2.16,25.415
pads on no net: P3.3 U1.6 U1.7 U1.8 U1.13 U1.14 U1.22 U1.24 U1.33 U1.40 U1.41 U1.42 U2.8 U2.9 U2.16 U2.20 U3.8 U3.9 U3.16 U3.20 U4.8 U4.9 U4.16 U4.20 U5.8 U5.9 U5.16 U5.20 U11.1 U11.7 U11.8 U11.9 U11.12 U11.13 U11.21 U11.22 U11.23 U11.24 U11.26 U11.27

## Polygon pours and split planes (outlines as drawn)
GND on Signal Layer 2 "Top Layer-No Net" (solid, pour order 8): 10.075,26.475 10.075,31.05 0.25,31.05 0.25,22.7 0.25,2.65 0.25,0.3 2.6,0.3 28.05,0.3 30.05,0.3 30.075,0.325 30.175,0.425 30.175,30.975 20.3,30.975 20.275,30.95 20.275,26.475
VDD on Signal Layer 1 "Top Layer-No Net" (solid, pour order 6): 20.275,26.475 10.05,26.475 10.05,29.8 0.255,29.8 0.255,24.18 0.255,21.174 0.255,21.276 0.255,17.085 0.255,0.325 2.525,0.35 22.215,0.35 22.275,0.325 30.16,0.325 30.16,30.975 30.025,29.8 29.9,29.8 20.275,29.8

## Keep-outs
Keep-Out Layer:
  lines w0.508: 0,0 0,31.675 9.65,31.675 9.65,36.225 20.595,36.225 20.595,31.678 20.598,31.675 30.43,31.675 30.43,0 0,0

## Other copper
Top Layer:
  rectangle net GND: 12.165,24.095 14.465,30.734
  rectangle net GND: 14.465,24.095 18.165,30.734

## Silkscreen, mask and mechanical layers (free items; w line width, h text height)
Top Overlay:
  text "Texavie" at 3.315,28.205 h1.52
Mechanical 1:
  the board outline again, w0.127

## Text inside footprints (layer, text, board x,y; h text height)
Bat: Bottom Overlay "CR2032" at 12.805,5.53 h1.52 r315